# Altium PCB Bluetooth_brelok.PcbDoc
Units mm, origin at the board's own origin, x right, y up, seen from the top; angles counter-clockwise.
Board outline 42 x 28 mm, 2 copper layers (Top Layer, Bottom Layer); 35 components, 34 nets, 113 pads, 110 vias.
Unrouted connection lines stored in the file: 1.
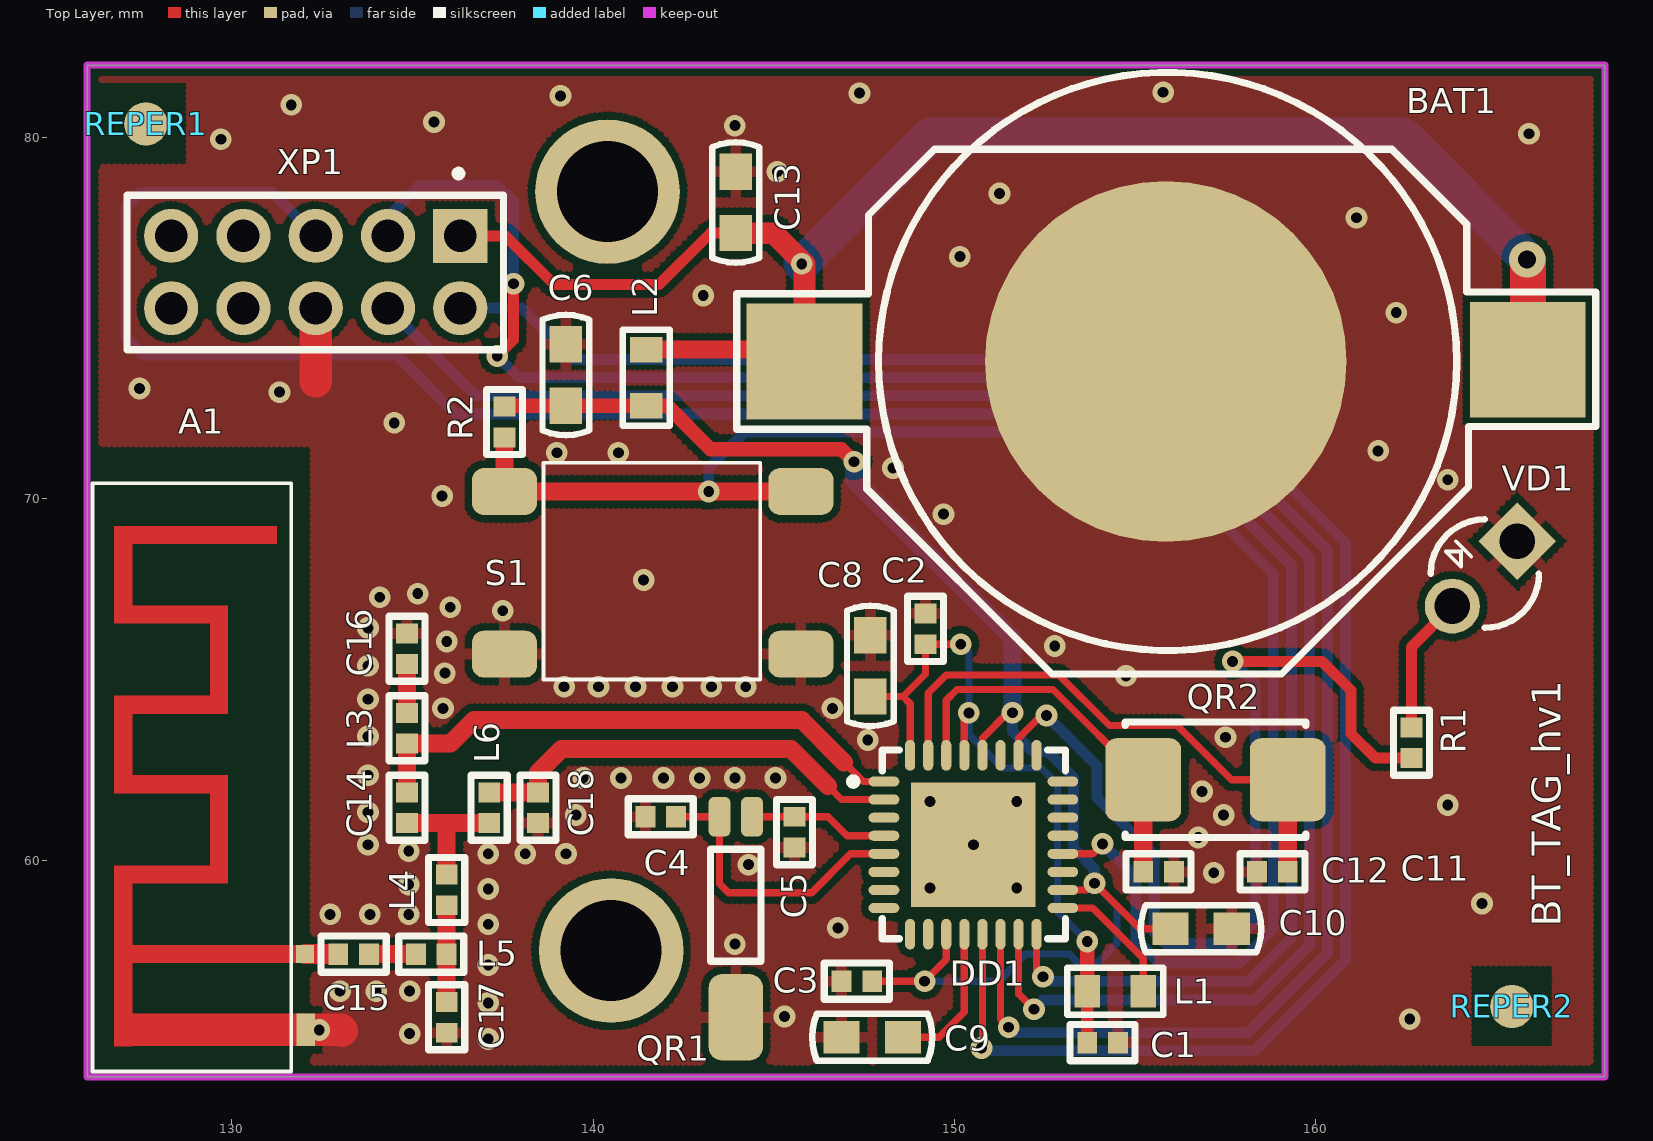
[diagram p0: Top Layer view]
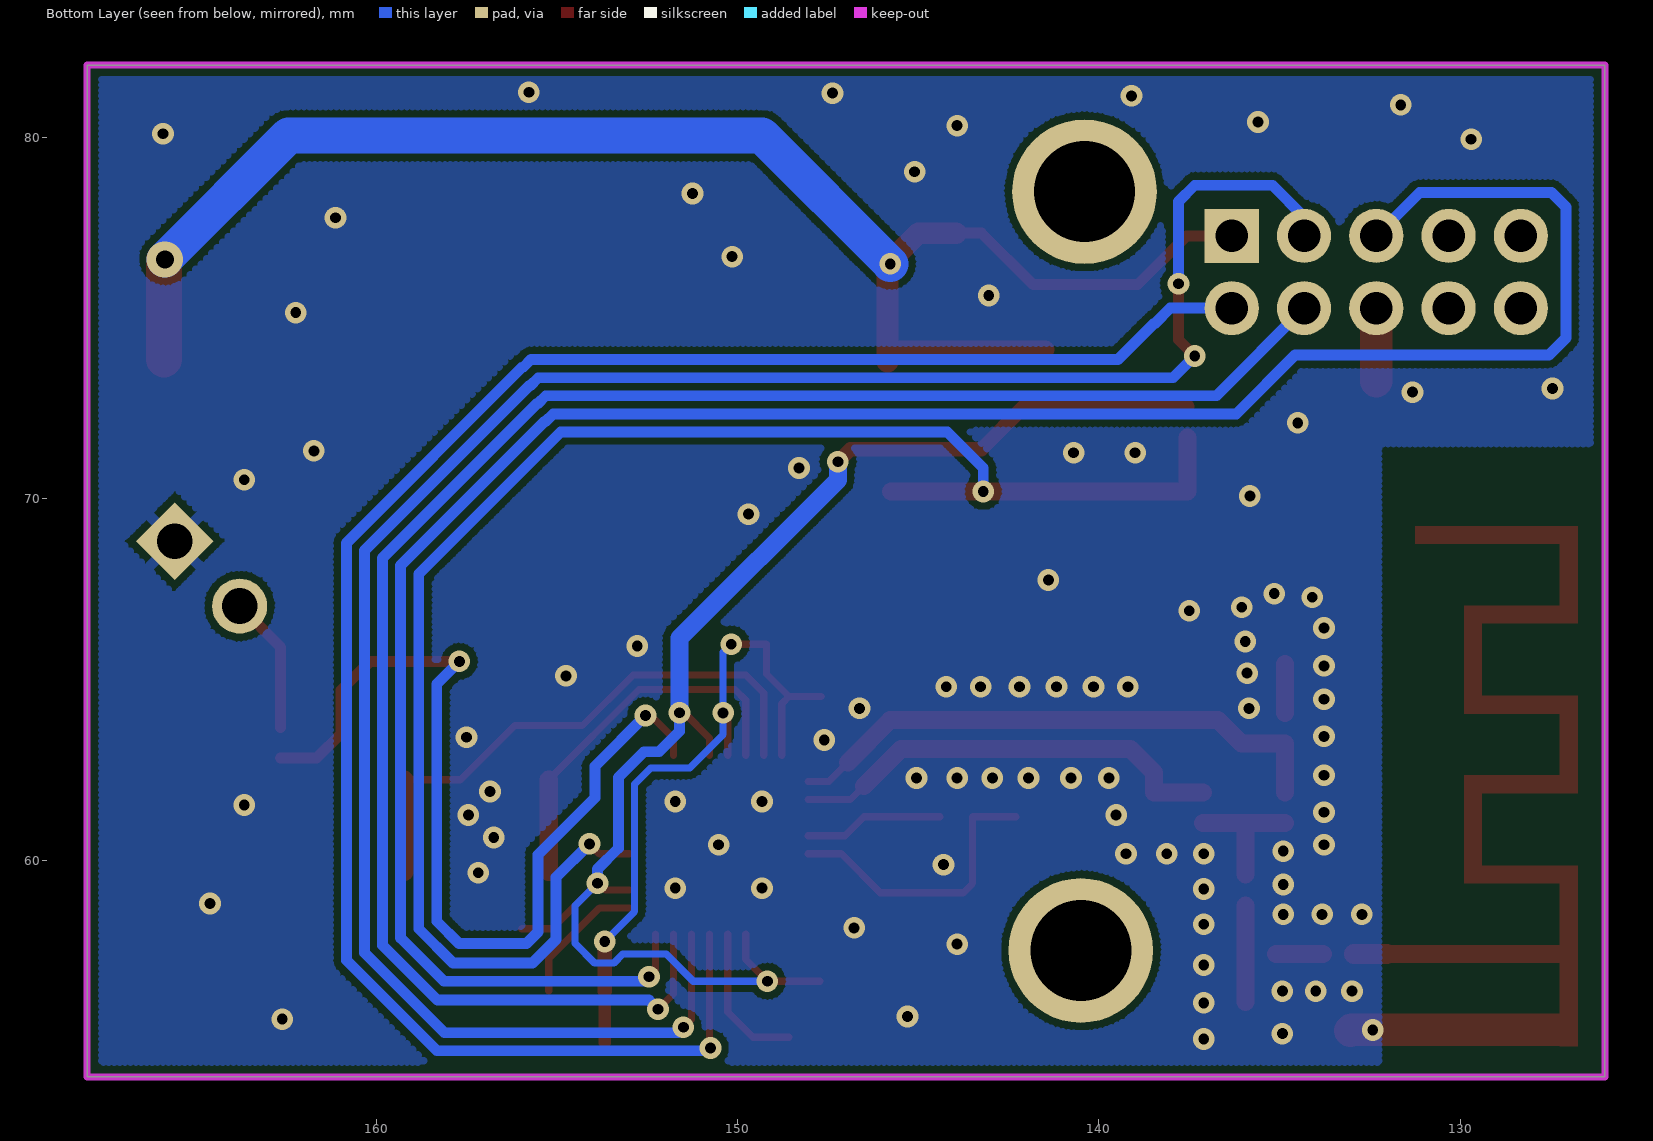
[diagram p1: Bottom Layer view, seen from below]

## Layer stack, top to bottom
Top Solder: solder mask 0.0102, Solder Resist, Dk 3.5
Top Layer: signal copper 0.0356
Dielectric 1: dielectric 0.32, FR-4, Dk 4.8
Bottom Layer: signal copper 0.0356
Bottom Solder: solder mask 0.0102, Solder Resist, Dk 3.5

## Board outline
126,54 168,54 168,82 126,82

## Design rules (kind name [scope] priority, off if disabled: settings)
Clearance [All] p1: gap=0.2
ComponentClearance [All] p1: gap=0.2 collisioncheckmode=3 verticalgap=2540 showdistances=FALSE
HoleSize [All] p1: absolutevalues=TRUE maxlimit=4 minlimit=0.025 maxpercent=80.000 minpercent=20.000
PolygonConnect PolygonConnect_1 [IsVia OR InComponent('BAT1') AND InNet('GND')] p1: connectstyle=Direct reliefconductorwidth=0.254 reliefentries=4 polygonreliefangle="90 Angle" airgapwidth=0.254
PolygonConnect [All] p2: connectstyle=Relief reliefconductorwidth=0.3 reliefentries=4 polygonreliefangle="90 Angle" airgapwidth=0.2
RoutingVias [All] p1: holewidth=0.4 width=0.8 viastyle="Through Hole" minholewidth=0.3 minwidth=0.6 maxholewidth=0.5 maxwidth=1
SolderMaskExpansion [All] p1: expansion=0.102
Width [All] p1: maxlimit=3 minlimit=0.2 preferedwidth=0.5
28 further rules are at their usual default settings.

## Classes and differential pairs
component class RF: A1 C14 C15 C16 C17 C18 L3 L4 L5 L6
component class Main: BAT1 C1 C2 C3 C4 C5 C6 C8 C9 C10 C11 C12 C13 DD1 L1 L2 QR1 QR2 R1 R2 REPER1 REPER2 S1 VD1 XP1

## Components (designator, comment, footprint, x,y, rotation, side; value= is the part's Value field where it differs from the comment)
A1 "Antenna Wi-Fi" Antenna_WiFi 132.025,57.4 r90 top
BAT1 "Keystone 3012TR" BAT_1632 145.85,73.8 r0 top
C1 "0.1uFx6.3V" CC0402 154.1,54.95 r0 top
C2 "0.1uFx6.3V" CC0402 149.2,66.4 r90 top
C3 "0.1uFx6.3V" CC0402 147.3,56.65 r0 top
C4 "12pF" CC0402 141.875,61.2 r0 top
C5 "12pF" CC0402 145.575,60.775 r90 top
C6 "0.1uF" CC0603 139.25,73.425 r270 top
C8 "10uFx6.3V" CC0603 147.675,65.375 r270 top
C9 "1uFx6.3V" CC0603 147.725,55.1 r0 top
C10 "10uFx6.3V" CC0603 156.825,58.1 r180 top
C11 "22pF" CC0402 158.8,59.675 r0 top
C12 "22pF" CC0402 155.65,59.675 r180 top
C13 "10uFx6.3V" CC0603 143.95,78.2 r270 top
C14 "1pF" CC0402 134.85,61.45 r90 top
C15 "12pF" CC0402 133.375,57.4 r180 top
C16 "6.8pF" CC0402 134.85,65.85 r270 top
C17 "1pF" CC0402 135.95,55.65 r90 top
C18 "1pF" CC0402 138.475,61.45 r90 top
DD1 "CC2650" QFN32_TI 148.05,62.175 r0 top
L1 "10uH" L0603 155.225,56.375 r180 top
L2 "BLM18HE152SN1" L0603 141.475,74.125 r270 top
L3 "2.4nH" L0402 134.85,63.65 r270 top
L4 "2nH" L0402 135.95,59.175 r270 top
L5 "2nH" L0402 135.525,57.4 r180 top
L6 "2.4nH" L0402 137.125,61.45 r270 top
QR1 "MS3V-T1R" MS3V-T1R 144.4,61.2 r270 top
QR2 "SJK-6L-24.0" AC5032_2 157.225,62.225 r180 top
R1 "1k" RC0402 162.65,63.25 r270 top
R2 "10k" RC0402 137.55,72.125 r90 top
REPER1 "REPER1.2" REPER1.2 127.625,80.375 r90 top
REPER2 "REPER1.2" REPER1.2 165.425,55.95 r90 top
S1 "DTSM-61N" DTSM-61N 137.55,70.2 r0 top
VD1 "BL-B45V1-L" LED3 165.575,68.825 r225 top
XP1 "PLD2-10" PLD2-10 136.325,77.25 r270 top

## Footprints (in the part's own frame and the unit in brackets; to place one, negate y for a bottom-side part, rotate by r counter-clockwise, add the part's x,y. Pads: shape width x height; smd on the part's side, far side on the other; paste and mask are expansions set on the pad)
AC5032_2 [mm]
  rrect30% 2.1x2.3 smd: 1(-2,0) 2(2,0)
  silkscreen extent -2.5,-1.6 2.5,1.6
Antenna_WiFi [mm] "2.43Ghz 2.5dBi"
  rect 0.5x0.5 smd paste-10 mask-10: 1(0,0)
  rect 0.9x0.5 smd paste-10 mask-10: 2(-2.1,-0.025)
  Top Layer region: -2.55,-0.125 -1.65,-0.125 -1.65,4.775 -2.55,4.775
  Top Layer region: -2.551,4.775 2.449,4.775 2.449,5.275 -2.551,5.275
  Top Layer region: -0.25,-0.125 0.25,-0.125 0.25,4.775 -0.25,4.775
  Top Layer region: 1.949,2.125 2.449,2.125 2.449,4.775 1.949,4.775
  Top Layer region: 2.45,2.125 4.45,2.125 4.45,2.625 2.45,2.625
  Top Layer region: 4.449,2.125 4.949,2.125 4.949,4.775 4.449,4.775
  Top Layer region: 4.449,4.775 7.149,4.775 7.149,5.275 4.449,5.275
  Top Layer region: 6.649,2.125 7.149,2.125 7.149,4.775 6.649,4.775
  Top Layer region: 7.15,2.125 9.15,2.125 9.15,2.625 7.15,2.625
  Top Layer region: 9.149,2.125 9.649,2.125 9.649,4.775 9.149,4.775
  Top Layer region: 9.149,4.775 11.849,4.775 11.849,5.275 9.149,5.275
  Top Layer region: 11.35,0.775 11.85,0.775 11.85,4.775 11.35,4.775
  silkscreen extent -3.25,0.38 13.03,5.87
BAT_1632 [mm]
  rect 3.2x3.2 smd: +(0,0) +(20.02,0.05)
  round 10 smd: -(10,0)
  silkscreen extent -1.88,-8.65 21.9,8
CC0402 [mm]
  rect 0.55x0.6 smd: 1(-0.425,0) 2(0.425,0)
  silkscreen extent -0.9,-0.5 0.9,0.5
CC0603 [mm]
  rect 1x0.9 smd paste-25.4: 1(-0.85,0) 2(0.85,0)
  silkscreen extent -1.66,-0.65 1.66,0.65
DTSM-61N [mm]
  rrect50% 1.8x1.3 smd: 1(0,0) 2(8.2,0) 3(0,-4.5) 4(8.2,-4.5)
  silkscreen extent 1.08,-5.2 7.08,0.8
L0402 [mm]
  rect 0.55x0.6 smd: 1(-0.425,0) 2(0.425,0)
  silkscreen extent -0.9,-0.5 0.9,0.5
L0603 [mm]
  rect 0.7x0.9 smd paste-25.4: 1(0,0) 2(1.549,0)
  silkscreen extent -0.55,-0.65 2.1,0.65
LED3 [mil]
  rect 60x60 hole 39: 1(0,0)
  round 60 hole 39: 2(100,0)
  silkscreen extent 8,-59 92,59
MS3V-T1R [mm]
  rrect50% 1.1x0.6 smd: 1(0,0) 2(0,-0.9)
  rrect50% 2.4x1.5 smd: 3(5.55,-0.45)
  silkscreen extent 0.9,-1.15 4,0.25
PLD2-10 [mm]
  rect 1.5x1.5 hole 0.9: 1(-0.025,0)
  round 1.5 hole 0.9: 2(1.975,0) 3(-0.025,-2) 4(1.975,-2) 5(-0.025,-4) 6(1.975,-4) 7(-0.025,-6) 8(1.975,-6) 9(-0.025,-8) 10(1.975,-8)
  silkscreen extent -1.15,-9.23 3.13,1.2
QFN32_TI [mm]
  oval 0.85x0.28 smd mask+0.05: 1(0,0) 2(0,-0.5) 3(0,-1) 4(0,-1.5) 5(0,-2) 6(0,-2.5) 7(0,-3) 8(0,-3.5) 17(4.95,-3.5) 18(4.95,-3) 19(4.95,-2.5) 20(4.95,-2) 21(4.95,-1.5) 22(4.95,-1) 23(4.95,-0.5) 24(4.95,0)
  oval 0.28x0.85 smd mask+0.05: 9(0.725,-4.225) 10(1.225,-4.225) 11(1.725,-4.225) 12(2.225,-4.225) 13(2.725,-4.225) 14(3.225,-4.225) 15(3.725,-4.225) 16(4.225,-4.225) 25(4.225,0.725) 26(3.725,0.725) 27(3.225,0.725) 28(2.725,0.725) 29(2.225,0.725) 30(1.725,0.725) 31(1.225,0.725) 32(0.725,0.725)
  rect 3.45x3.45 smd mask+0.05: 33(2.475,-1.75)
  silkscreen extent -0.95,-4.35 5.02,0.87
RC0402 [mm]
  rect 0.55x0.6 smd: 1(-0.425,0) 2(0.425,0)
  silkscreen extent -0.9,-0.5 0.9,0.5
REPER1.2 [mm]
  round 1.2 smd paste-25.4 mask-25.4: 1(0,0)
  Top Layer pour cut-out: -1.2,-1.2 1.2,-1.2 1.2,1.2 -1.2,1.2

## Part data
A1: "2.43GHz"
BAT1: library part BAT_1632
C1 C2 C3 C4 C5 C11 C12 C14 C15 C16 C17 C18: library part CC0402
C6 C8 C9 C10 C13: library part CC0603, "CC0603"
DD1: library part CC2650RHB, "CC2650RHBT"
L1 L2: library part L0603, "L0603"
L3 L4 L5 L6: library part L0402, "L0402"
QR1: "CRYSTAL_32768 Hz"
QR2: library part AC5032_2, "AC5032/2"
R1 R2: library part RC0402
S1: "Switch, Single Pole, Single Throw, Normally Open"
VD1: library part LED_3, "LED_3"

## Free pads (board coordinates)
  round 4 hole 2.8 unplated: 0(140.4,78.5) 0(140.5,57.5)

## Via types
v1: diameter 0.6, hole 0.3, Top Layer to Bottom Layer, 109 vias
v2: diameter 1, hole 0.5, Top Layer to Bottom Layer, 1 vias

## Nets (pads, with @x,y where several pads share a name; then routed paths per layer and width w, separated by ;. In a path a pad name is that pad's centre, name@x,y a point inside that pad or via, vN(x,y) a via of type N, cw(c..) or ccw(c..) an arc to the next point about the centre after c; other vN are vias at no path point)
BUTTON: DD1.20 R2.1 S1.1 S1.2 | length 46.5
  Top Layer w0.2: DD1.20 153.825,60.175 v1(154.1,60.45)
  Top Layer w0.5: R2.1 S1.1 S1.2
  Bottom Layer w0.3: v1(143.2,70.2) 143.2,70.85 144.2,71.85 154.893,71.85 158.825,67.918 158.825,58.1 157.875,57.15 155.675,57.15 155.025,57.8 155.025,59.525 v1(154.1,60.45)
GND: A1.2 BAT1.- C1.2 C2.2 C3.1 C4.1 C5.1 C6.1 C8.1 C9.1 C10.1 C11.1 C12.1 C13.1 C16.1 C17.1 C18.1 DD1.33 QR1.3 S1.3 S1.4 VD1.1 XP1.6 | length 3
  Top Layer w0.9: A1.2 133.025,55.3 133.05,55.275 ; 132.325,73.25 XP1.6
  other v1: 137.1,55.05 134.925,55.2 132.425,55.3 162.6,55.6 145.3,55.675 137.1,56.05 133,56.375 134,56.375 134.925,56.375 137.1,57.1 143.925,57.675 146.775,58.125 137.1,58.225 132.725,58.5 133.825,58.5 134.9,58.5 164.6,58.8 137.1,59.2 149.325,59.225 151.725,59.225 134.9,59.325 157.175,59.65 144.3,59.875 137.1,60.175 138.125,60.175 139.25,60.175 134.9,60.25 133.775,60.425 150.525,60.425 156.75,60.625 139.525,61.25 157.45,61.25 133.775,61.325 163.65,61.525 149.325,61.625 151.725,61.625 156.85,61.9 139.725,62.275 140.775,62.275 141.95,62.275 142.95,62.275 143.925,62.275 145.05,62.275 133.775,62.35 147.6,63.325 157.5,63.4 133.775,63.425 135.85,64.2 146.625,64.2 133.775,64.45 139.2,64.8 140.15,64.8 141.175,64.8 142.2,64.8 143.275,64.8 144.225,64.8 154.75,65.1 135.9,65.175 133.775,65.375 152.775,65.925 135.95,66.05 133.775,66.425 137.5,66.9 136.05,67 134.1,67.275 135.15,67.375 141.4,67.75 149.7,69.575 135.825,70.075 163.65,70.525 148.3,70.85 139,71.275 140.7,71.275 161.725,71.325 134.5,72.1 131.325,72.95 127.45,73.05 162.225,75.15 143.05,75.625 150.15,76.7 161.125,77.775 151.25,78.45 145.1,79.05 129.7,79.95 165.9,80.1 143.925,80.325 135.6,80.425 131.65,80.9 139.1,81.15 147.375,81.225 155.775,81.25
LED: DD1.26 R1.2 | length 26.1
  Top Layer w0.2: DD1.26 151.775,63.375 152.4,64 v1(152.55,64)
  Top Layer w0.3: v1(157.7,65.5) 160.175,65.5 160.975,64.7 160.975,63.5 161.65,62.825 R1.2
  Bottom Layer w0.3: v1(152.55,64) 153.95,62.6 153.95,61.725 155.525,60.15 155.525,58.007 155.841,57.691 157.709,57.691 158.325,58.307 158.325,64.875 v1(157.7,65.5)
MISO: DD1.25
MOSI: DD1.24
MRDO: DD1.8
NetA1_1: A1.1 C15.2 | length 0.9
  Top Layer w0.55: A1.1 C15.2
NetC1_1: C1.1 C2.1 C8.2 DD1.29 DD1.32 L1.2 | length 19.6
  Top Layer w0.2: C8.2 148.575,64.525 ; DD1.32 148.775,64.325 148.575,64.525 ; v1(150.175,65.975) C2.1 149.2,65.15 148.575,64.525 ; DD1.29 150.275,63.95 v1(150.4,64.075)
  Top Layer w0.35: C1.1 L1.2
  Top Layer w0.4: L1.2 v1(153.675,57.75)
  Bottom Layer w0.2: v1(150.175,65.975) 150.4,65.75 v1(150.4,64.075) 150.4,63.475 151.325,62.55 152.4,62.55 152.85,62.1 152.85,58.575 v1(153.675,57.75)
NetC4_2: C4.2 DD1.5 QR1.2 | length 8.1
  Top Layer w0.2: C4.2 QR1.2 143.5,59.35 143.75,59.1 146.05,59.1 147.125,60.175 DD1.5
NetC5_2: C5.2 DD1.4 QR1.1 | length 3.9
  Top Layer w0.2: QR1.1 C5.2 146.5,61.2 147.025,60.675 DD1.4
NetC9_2: C9.2 DD1.12 | length 4.1
  Top Layer w0.2: C9.2 149.575,55.1 150.275,55.8 DD1.12
NetC11_2: C11.2 DD1.31 QR2.1 | length 15.6
  Top Layer w0.2: DD1.31 149.275,64.625 149.775,65.125 152.891,65.125 154.291,63.725 156.165,63.725 157.665,62.225 QR2.1
  Top Layer w0.5: C11.2 QR2.1
NetC12_2: C12.2 DD1.30 QR2.2 | length 10.7
  Top Layer w0.2: DD1.30 149.775,64.425 150.075,64.725 152.725,64.725 QR2.2
  Top Layer w0.5: C12.2 QR2.2
NetC14_1: C14.1 L4.1 L6.2 | length 3.7
  Top Layer w0.5: C14.1 135.975,61.025 ; L4.1 135.95,61 135.975,61.025 ; L6.2 135.975,61.025
NetC15_1: C15.1 L5.2 | length 1.3
  Top Layer w0.5: C15.1 L5.2
NetC16_2: C16.2 L3.1 | length 1.3
  Top Layer w0.5: L3.1 C16.2
NetC17_2: C17.2 L4.2 L5.1 | length 2.7
  Top Layer w0.5: C17.2 L5.1 L4.2
NetDD1_17: DD1.17 L1.1 | length 3.7
  Top Layer w0.2: DD1.17 153.825,58.675 155.225,57.275 L1.1
NetR1_1: R1.1 VD1.2 | length 3.8
  Top Layer w0.3: R1.1 162.65,65.9 VD1.2
RF_N: C18.2 DD1.2 L6.1 | length 12.3
  Top Layer w0.2: 146.5,62.05 146.875,61.675 DD1.2
  Top Layer w0.5: L6.1 C18.2 138.475,62.425 139.125,63.075 145.475,63.075 146.5,62.05
RF_P: C14.2 DD1.1 L3.2 | length 15.5
  Top Layer w0.2: 146.95,62.7 147.475,62.175 DD1.1
  Top Layer w0.5: C14.2 L3.2 136.05,63.225 136.7,63.875 145.775,63.875 146.95,62.7
RX_TX: DD1.3
RXD: DD1.7
SCK: DD1.23
SRDI: DD1.9
SS0: DD1.22
SS1: DD1.21
TCK: DD1.14 XP1.3 | length 57.8
  Top Layer w0.2: DD1.14 151.275,55.6 v1(151.5,55.375)
  Top Layer w0.3: v1(137.35,73.95) 137.8,74.4 v1(137.8,75.95)
  Bottom Layer w0.3: XP1.3 134.325,77.8 135.2,78.675 137.35,78.675 137.8,78.225 v1(137.8,75.95) ; v1(137.35,73.95) 137.95,73.35 155.514,73.35 155.727,73.137 155.759,73.137 160.325,68.571 160.325,57.436 158.114,55.225 151.65,55.225 v1(151.5,55.375)
TDI: DD1.16 XP1.5 | length 63.4
  Top Layer w0.2: DD1.16 152.275,56.95 v1(152.45,56.775)
  Bottom Layer w0.3: XP1.5 131.125,78.475 127.475,78.475 127.075,78.075 127.075,74.45 127.55,73.975 134.575,73.975 136.2,72.35 155.1,72.35 155.313,72.137 155.345,72.137 159.325,68.157 159.325,57.85 158.125,56.65 152.575,56.65 v1(152.45,56.775)
TDO: DD1.15 XP1.4 | length 49.7
  Top Layer w0.2: DD1.15 151.775,56.3 v1(152.2,55.875)
  Bottom Layer w0.3: XP1.4 136.75,72.85 155.307,72.85 155.52,72.637 155.552,72.637 159.825,68.364 159.825,57.643 158.307,56.125 152.45,56.125 v1(152.2,55.875)
TMS: DD1.13 XP1.2 | length 53
  Top Layer w0.2: v1(150.75,54.8) 150.775,54.825 DD1.13
  Bottom Layer w0.3: XP1.2 138.025,75.275 138.45,74.85 138.475,74.85 139.475,73.85 155.721,73.85 155.934,73.637 155.966,73.637 160.825,68.778 160.825,57.229 158.321,54.725 150.825,54.725 v1(150.75,54.8)
TXD: DD1.6
VBAT: BAT1.+ C13.2 L2.1 XP1.1 | length 44
  Top Layer w0.3: XP1.1 137.575,77.275 138.925,75.925 141.825,75.925 143.25,77.35 C13.2
  Top Layer w0.5: L2.1 145.525,74.125 BAT1.+@145.85,73.8
  Top Layer w0.6: C13.2 145,77.35 145.85,76.5 BAT1.+@145.85,73.8
  Top Layer w1: v2(165.85,76.625) 165.87,76.605 BAT1.+@165.87,73.85
  Bottom Layer w1: v1(145.775,76.5) 149.325,80.05 162.425,80.05 v2(165.85,76.625)
VBAT_F: C3.2 C6.2 C10.2 DD1.11 DD1.18 DD1.28 L2.2 R2.2 | length 41.1
  Top Layer w0.2: C3.2 v1(149.175,56.65) 149.775,57.25 DD1.11 ; DD1.28 150.775,63.375 151.478,64.078 v1(151.607,64.078) ; DD1.18 153.65,59.175 153.85,59.375 153.86,59.375 v1(153.875,59.36) 155.135,58.1 C10.2
  Top Layer w0.4: R2.2 137.575,72.575 139.15,72.575 140.375,72.575 142.05,72.575 143.25,71.375 146.875,71.375 v1(147.225,71.025)
  Bottom Layer w0.2: v1(149.175,56.65) 151.225,56.65 151.975,57.4 153.176,57.4 153.426,57.15 153.95,57.15 154.5,57.7 154.5,58.735 v1(153.875,59.36)
  Bottom Layer w0.3: v1(151.607,64.078) 151.607,63.568 152.175,63 152.586,63 153.3,62.286 153.3,60.331 153.875,59.756 v1(153.875,59.36)
  Bottom Layer w0.5: v1(147.225,71.025) 147.225,70.525 151.607,66.143 v1(151.607,64.078)
pads on no net: DD1.10 DD1.19 DD1.27 REPER1.1 REPER2.1 XP1.7 XP1.8 XP1.9 XP1.10

## Polygon pours and split planes (outlines as drawn)
GND on Top Layer "GND_L01_P000" (hatched 90Degree grid 0.15 track 0.2, remove dead copper, pour order 0): 126,82 168,82 168,54 126,54
GND on Bottom Layer "GND_L02_P002" (hatched 90Degree grid 0.15 track 0.2, remove dead copper, pour order 2): 126,82 168,82 168,54 126,54

## Keep-outs
Keep-Out Layer:
  the board outline again, w0.2

## Other copper
Top Layer:
  rectangle net NetA1_1: 129.4,59.525 129.9,60.1
  pour cut-out: 126,71.525 132.25,71.525 132.25,54 126,54
Bottom Layer:
  pour cut-out: 126,71.525 132.25,71.525 132.25,54 126,54

## Silkscreen, mask and mechanical layers (free items; w line width, h text height)
Top Overlay:
  circle w0.2: c136.275,79 r0.09
  text "BT_TAG_hv1" at 166.775,58.15 h0.8 r90